# EAGLE board rescue_linea5photo (EAGLE 9.1.3)
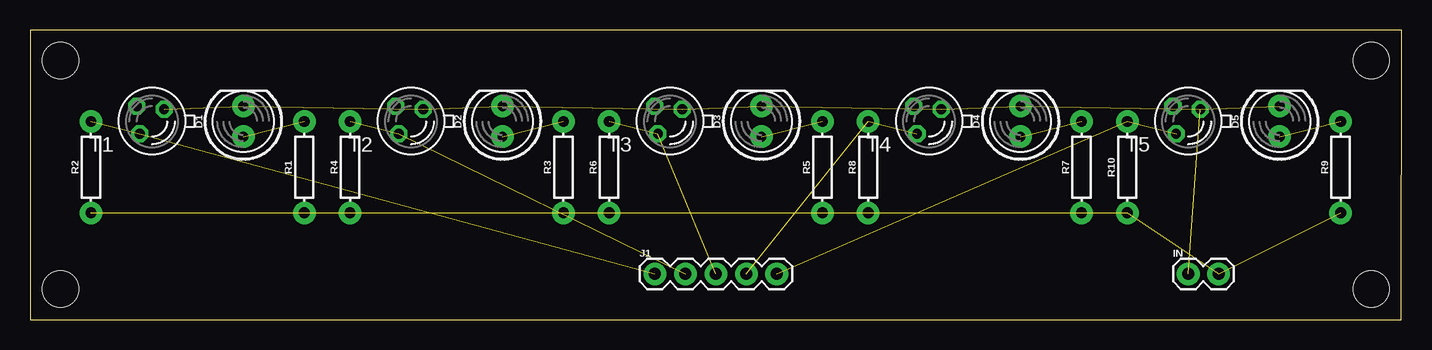
[diagram p0: board, top side]
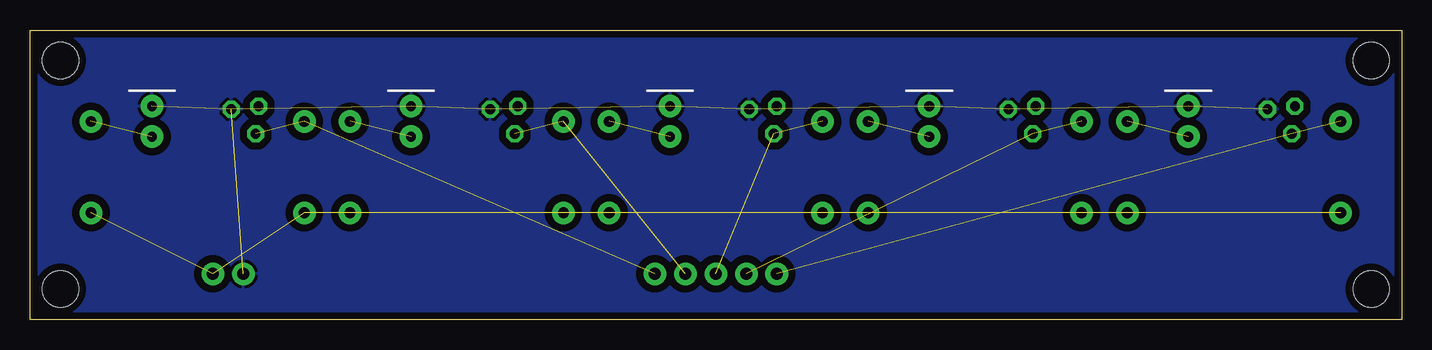
[diagram p1: board, bottom side, seen from below]

Size 114.3 x 24.13 mm. Coordinates in mm from the lower left corner, seen from the top.
Outline: 0,0 114.28,0 114.3,24.13 0,24.13 0,0
Copper layers (1*16): Top 0.035mm / dielectric 1.5mm / Bottom 0.035mm
Design rules "SparkFun": minimum track width 8mil, minimum drill 20mil, track to track 8mil, track to pad 8mil, pad to pad 8mil, via to via 8mil, smd to smd 8mil, copper to edge 10mil, drill to drill 8mil, minimum pad ring 12mil, minimum via ring 10mil, stop-mask expansion 4mil, vias tented up to drill 25mil, thermal gap 10mil
Holes 3 mm at 2.54,21.59 2.54,2.54 111.76,2.54 111.76,21.59

## Footprints (pad centres in the part's own frame; a part is rotated, then mirrored left to right if it is on the bottom)
LED_5MM = drill 0.813 pad 1.88: A -1.27,0; K 1.27,0
1X02 = drill 1.016 pad 1.88: 1 0,0; 2 2.54,0
1X05 = drill 1.016 pad 1.88: 1 0,0; 2 2.54,0; 3 5.08,0; 4 7.62,0; 5 10.16,0
AXIAL-0.3 = drill 0.9 pad 1.88: P$1 -3.81,0; P$2 3.81,0
BP103 = drill 0.813 octagon: B 1.27,-1.27; C 1.016,1.016; E -1.016,-1.016

## Placement (x,y rotation side)
D1  [LED_5MM]  17.78,16.51 90 top
D2  [LED_5MM]  39.37,16.51 90 top
D3  [LED_5MM]  60.96,16.51 90 top
D4  [LED_5MM]  82.55,16.51 90 top
D5  [LED_5MM]  104.14,16.51 90 top
IN  [1X02]  96.52,3.81 0 top
J1  [1X05]  52.07,3.81 0 top
R1  220  [AXIAL-0.3]  22.86,12.7 90 top
R2  10k  [AXIAL-0.3]  5.08,12.7 90 top
R3  220  [AXIAL-0.3]  44.45,12.7 90 top
R4  10k  [AXIAL-0.3]  26.67,12.7 90 top
R5  220  [AXIAL-0.3]  66.04,12.7 90 top
R6  10k  [AXIAL-0.3]  48.26,12.7 90 top
R7  220  [AXIAL-0.3]  87.63,12.7 90 top
R8  10k  [AXIAL-0.3]  69.85,12.7 90 top
R9  220  [AXIAL-0.3]  109.22,12.7 90 top
R10  10k  [AXIAL-0.3]  91.44,12.7 90 top
T1  BP103  [BP103]  10.16,16.51 180 top
T2  BP103  [BP103]  31.75,16.51 180 top
T3  BP103  [BP103]  53.34,16.51 180 top
T4  BP103  [BP103]  74.93,16.51 180 top
T5  BP103  [BP103]  96.52,16.51 180 top

## Library data of the parts
D1-D5 = SparkFun-LED
IN J1 = SparkFun-Connectors
R1-R10 = SparkFun-Resistors
T1-T5 = opto-trans-siemens; OC_FARNELL: unknown; OC_NEWARK: unknown

## Nets
GND: D1.K D2.K D3.K D4.K D5.K IN.1 T1.E T2.E T3.E T4.E T5.E
N$1: D2.A R3.P$2
N$2: D3.A R5.P$2
N$3: D4.A R7.P$2
N$4: D1.A R1.P$2
N$5: D5.A R9.P$2
OUT1: J1.1 R2.P$2 T1.C
OUT2: J1.2 R4.P$2 T2.C
OUT3: J1.3 R6.P$2 T3.C
OUT4: J1.4 R8.P$2 T4.C
OUT5: J1.5 R10.P$2 T5.C
VCC: IN.2 R1.P$1 R2.P$1 R3.P$1 R4.P$1 R5.P$1 R6.P$1 R7.P$1 R8.P$1 R9.P$1 R10.P$1

## Tracks (layer width: path | path; a pad name or v marks a point on that pad's centre or on a via)
GND  (10 unrouted)
  pour Bottom (isolate 0.61): -1.27,25.4 115.57,25.4 115.57,-1.27 -1.27,-1.27
N$1  (1 unrouted)
N$2  (1 unrouted)
N$3  (1 unrouted)
N$4  (1 unrouted)
N$5  (1 unrouted)
OUT1  (2 unrouted)
OUT2  (2 unrouted)
OUT3  (2 unrouted)
OUT4  (2 unrouted)
OUT5  (2 unrouted)
VCC  (10 unrouted)